# Altium PCB Cool.PcbDoc
Units mil, origin at the board's own origin, x right, y up, seen from the top; angles counter-clockwise.
Board outline 2569.58 x 5324.99 mil, 2 copper layers (Top Layer, Bottom Layer); 68 components, 80 nets, 334 pads, 177 vias.
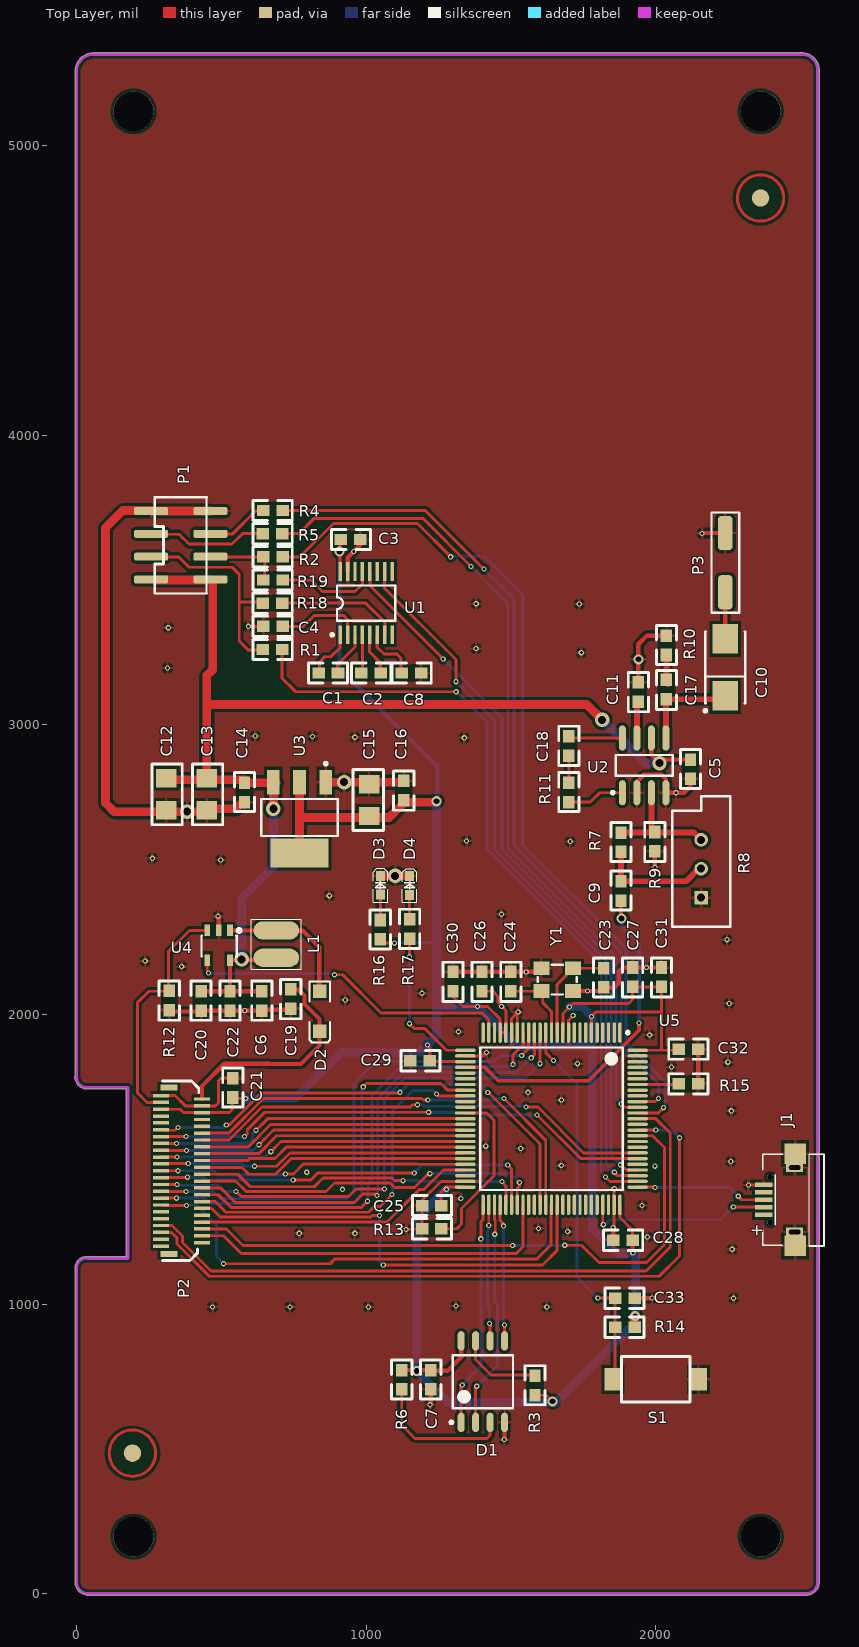
[diagram p0: Top Layer view]
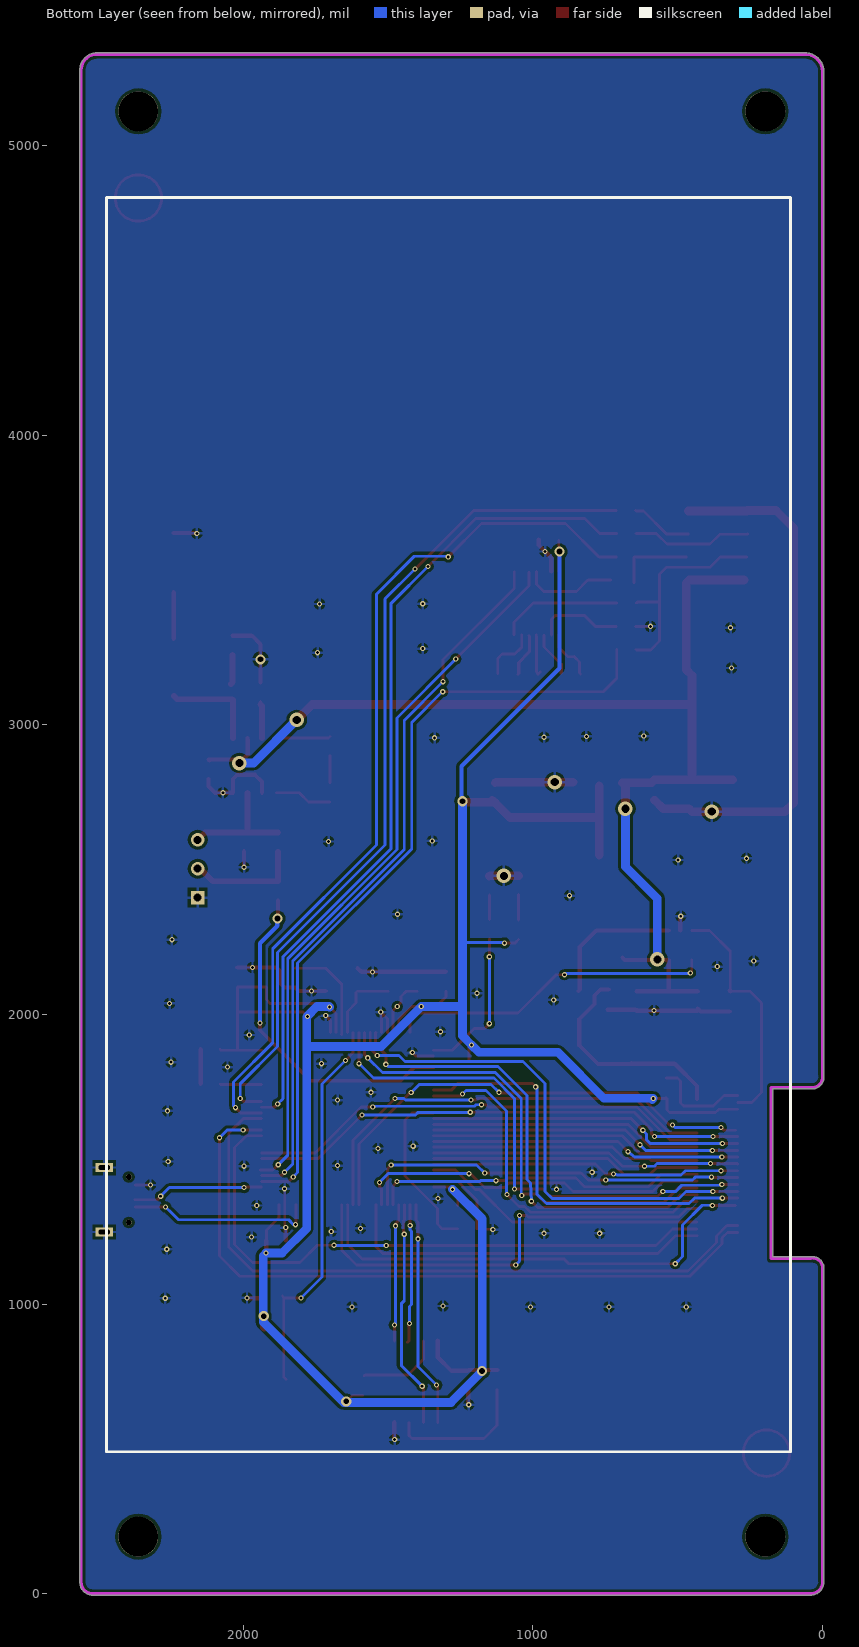
[diagram p1: Bottom Layer view, seen from below]

## Layer stack, top to bottom
Top Layer: signal copper 1.4
Dielectric: dielectric 12.6, FR-4, Dk 4.8
Bottom Layer: signal copper 1.4

## Board outline
-5.01,40 -5.01,1130 cw(c0,1130) -4.93,1130.94 cw(c33.74,1123.74) 40.45,1162.5 172.15,1162.5 172.15,1743.02 30,1743.02 cw(c30,1748.03) 29.18,1743.08 cw(c35.98,1784.02) -5.01,1790.4 -5.01,5249.8 cw(c59.96,5255) -5,5260.41 cw(c0,5260) -5,5260.43 cw(c59.96,5255) 54.53,5319.96 cw(c54.96,5314.96) 54.96,5319.98 2505.04,5319.98 cw(c2505.04,5260.94) 2564.07,5260.94 2564.07,39.06 cw(c2520,39.06) 2520,-5.02 40,-5.02 cw(c40,40)

## Design rules (kind name [scope] priority, off if disabled: settings)
Clearance [All] p1: gap=7
ComponentClearance [All] p1: gap=10 collisioncheckmode=3 verticalgap=10
PolygonConnect [All] p1: connectstyle=Relief reliefconductorwidth=10 reliefentries=4 polygonreliefangle="90 Angle"
RoutingVias [All] p1: holewidth=10 width=18 viastyle="Through Hole" minholewidth=8 minwidth=15 maxholewidth=28 maxwidth=50
SolderMaskExpansion [All] p1: expansion=4
TestPointUsage [All] p1: valid=0 allowmultiple=FALSE
Testpoint [All] p1: side=15 testpointundercomponent=TRUE minsize=40 maxsize=100 preferedsize=60 minholesize=0 maxholesize=40 preferedholesize=32 testpointgrid=1 style=1023 order=0123456789
Width [All] p1: maxlimit=30 minlimit=8 preferedwidth=10
18 further rules are at their usual default settings.

## Classes and differential pairs
component class Cool: C1 C2 C3 C4 C5 C6 C7 C8 C9 C10 C11 C12 C13 C14 C15 C16 C17 C18 C19 C20 C21 C22 D1 D2 L1 P1 P2 P3 R1 R2 R3 R4 R5 R6 R7 R8 R9 R10 R11 R12 R18 R19 U1 U2 U3 U4
component class mcu: C23 C24 C25 C26 C27 C28 C29 C30 C31 C32 C33 D3 D4 J1 R13 R14 R15 R16 R17 S1 U5 Y1

## Components (designator, comment, footprint, x,y, rotation, side; value= is the part's Value field where it differs from the comment)
C1 "100n" 0603 836,3179 r0 top
C2 "100n" 0603 1050,3179 r180 top
C3 "100n" 0603 980,3640 r180 top
C4 "100n" 0603 645,3340 r0 top
C5 "100n" 0603 2120,2880 r270 top
C6 "100n" 0603 640,2080 r270 top
C7 "100n" 0603 1223,772 r270 top
C8 "100n" 0603 1190,3179 r180 top
C9 "4.7uF" 0603 1880,2460 r270 top
C10 "220uF/6.3V" 6032 2240,3100 r90 top
C11 "100n" 0603 1940,3080 r90 top
C12 "47uF" 1206 310,2760 r270 top
C13 "22uF" 1206 450,2760 r270 top
C14 "100n" 0603 580,2800 r270 top
C15 "22uF" 1206 1010,2740 r90 top
C16 "100n" 0603 1130,2740 r90 top
C17 "4.7uF" 0603 2037,3088 r90 top
C18 "10uF" 0603 1700,2960 r270 top
C19 "100n" 0603 740,2020 r90 top
C20 "4.7uF" 0603 430,2080 r270 top
C21 "100n" 0603 540,1780 r270 top
C22 "100n" 0603 530,2080 r270 top
C23 "20pF" 0603 1820,2160 r270 top
C24 "20pF" 0603 1500,2080 r90 top
C25 "100n" 0603 1260,1340 r180 top
C26 "100n" 0603 1400,2080 r90 top
C27 "100n" 0603 1920,2095 r90 top
C28 "100n" 0603 1920,1220 r180 top
C29 "100n" 0603 1220,1840 r180 top
C30 "100n" 0603 1300,2080 r90 top
C31 "100n" 0603 2020,2095 r90 top
C32 "100n" 0603 2080,1880 r0 top
C33 "100n" 0603 1860,1020 r0 top
D1 "W25Q64" SOIC127P790X200-8N 1403,732 r90 top
D2 "SS14" SOD123 840,2080 r270 top
D3 "LED" 0603-LED 1049,2446 r90 top
D4 "LED" 0603-LED 1150,2445 r90 top
J1 "MICRO-USB" MICRO-USB 2460,1360 r90 top
L1 "4.7uH" SMD4532 690,2290 r270 top
P1 "INTERFACE" P_HEAD_2X4 360,3620 r270 top
P2 "TFT45_YC450001FW" FPC45 362.2,1460 r90 top locked
P3 "Header 2" P_Head_2 2240,3560 r0 top
R1 "0R" 0603 710,3260 r180 top
R2 "0R" 0603 645,3580 r0 top
R3 "10K" 0603 1583,752 r270 top
R4 "0R" 0603 645,3740 r0 top
R5 "0R" 0603 710,3660 r180 top
R6 "10K" 0603 1123,772 r270 top
R7 "4.99R" 0603 1880,2628 r270 top
R8 "RPot" VR5 2157,2503 r90 top
R9 "4.99R" 0603 1997,2563 r90 top
R10 "10R" 0603 2037,3308 r270 top
R11 "1.2K" 0603 1700,2800 r270 top
R12 "4.99R" 0603 320,2015 r90 top
R13 "10K" 0603 1260,1260 r180 top
R14 "10K" 0603 1860,920 r0 top
R15 "10K" 0603 2080,1760 r0 top
R16 "10K" 0603 1049,2326 r270 top
R17 "10K" 0603 1150,2328 r270 top
R18 "0R" 0603 710,3420 r180 top
R19 "0R" 0603 645,3500 r0 top
S1 "SW-PB" KEY6*4 2000,740 r0 top
U1 "MAX3232EUE" TSSOP16 1000,3420 r0 top
U2 "LM386M-1" M08A_N 1960,2860 r90 top
U3 "LM1117MPX-3.3" SOT223 770,2680 r180 top
U4 "MP3302" sot23-5 530,2290 r180 top
U5 "STM32F103V8T6" STM-LQFP100_N 1640,1640 r270 top
Y1 "12M" XTAL-SMD3225 1660,2120 r180 top

## Footprints (in the part's own frame and the unit in brackets; to place one, negate y for a bottom-side part, rotate by r counter-clockwise, add the part's x,y. Pads: shape width x height; smd on the part's side, far side on the other; paste and mask are expansions set on the pad)
0603 [mm]
  rect 1.1x1 smd: 1(0,0) 2(1.7,0)
  silkscreen extent -0.89,-0.89 2.54,0.89
0603-LED [mil]
  rect 35x31.5 smd: 1(-32.5,0) 2(32.5,0)
  silkscreen extent -58,-25 58,25
1206 [mm] "Chip Capacitor; Body 3.2 x 1.6 mm (LxW typ)"
  rect 1.6x1.8 smd: 1(-1.4,0) 2(1.4,0)
  silkscreen extent -2.67,-1.27 2.67,1.4
6032 [mm]
  rect 2.6x2.2 smd: 1(0,0) 2(5,0)
  silkscreen extent -1.42,-1.75 5.65,1.87
FPC45 [mm]
  rect 0.5x1.5 smd: 0(-7.3,1.1) 0(7.3,1.1)
  rect 0.3x1.4 smd: 1(-6.604,1.778) 2(-6.3,-1.8) 3(-6,1.778) 4(-5.7,-1.8) 5(-5.4,1.778) 6(-5.1,-1.8) 7(-4.8,1.778) 8(-4.5,-1.8) 9(-4.2,1.778) 10(-3.9,-1.8) 11(-3.6,1.778) 12(-3.3,-1.8) 13(-3,1.778) 14(-2.7,-1.8) 15(-2.4,1.778) 16(-2.1,-1.8) 17(-1.8,1.778) 18(-1.5,-1.8) 19(-1.2,1.778) 20(-0.9,-1.8) 21(-0.6,1.778) 22(-0.3,-1.8) 23(0,1.778) 24(0.3,-1.8) 25(0.6,1.778) 26(0.9,-1.8) 27(1.2,1.778) 28(1.5,-1.8) 29(1.8,1.778) 30(2.1,-1.8) 31(2.4,1.778) 32(2.7,-1.8) 33(3,1.778) 34(3.3,-1.8) 35(3.6,1.778) 36(3.9,-1.8) 37(4.2,1.778) 38(4.5,-1.8) 39(4.8,1.778) 40(5.1,-1.8) 41(5.4,1.778) 42(5.7,-1.8) 43(6,1.778) 44(6.3,-1.8) 45(6.6,1.778)
  silkscreen extent -7.87,-1.52 7.87,1.65
KEY6*4 [mm]
  rect 1.5x2 smd: 1(-3.75,0) 2(3.75,0)
  silkscreen extent -3,-2 3,2
M08A_N [mm] "SOIC, 8-Leads, Body 4.9x3.9mm, Pitch 1.27mm, IPC Medium Density"
  oval 2.2x0.6 smd: 1(-2.4,1.905) 2(-2.4,0.635) 3(-2.4,-0.635) 4(-2.4,-1.905) 5(2.4,-1.905) 6(2.4,-0.635) 7(2.4,0.635) 8(2.4,1.905)
  silkscreen extent -2.52,-2.5 0.9,2.88, body extent -1.95,-2.45 1.95,2.45, height 1.76
MICRO-USB [mm]
  rect 0.4x1.55 smd: 1(-1.3,2.2) 2(-0.65,2.2) 3(0,2.2) 4(0.65,2.2) 5(1.3,2.2)
  rect 0.8x1.5 hole 0.4 slot 1 at 90 deg: 6(2.825,-0.5) 7(-2.825,-0.5)
  rect 1.8x1.9 smd: 6(4.05,-0.55) 7(-4.05,-0.55)
  round 0.5 hole 0.5 unplated: ""(-2,1.65) ""(2,1.65)
  silkscreen extent -4.05,-3.07 4,2.3
P_Head_2 [mm]
  rrect50% 1.3x3 smd: 1(0,-2.6) 2(0,2.6)
  silkscreen extent -1.2,-4.4 1.22,4.4
P_HEAD_2X4 [mm]
  rrect50% 0.7x3 smd: 1(-3,-2.6) 2(-3,2.6) 3(-1,-2.6) 4(-1,2.6) 5(1,-2.6) 6(1,2.6) 7(3,-2.6) 8(3,2.6)
  silkscreen extent -4.2,-2.29 4.24,2.29
SMD4532 [mm]
  oval 1.6x4 smd: 1(0,0) 2(2.4,0)
  silkscreen extent -1,-2.2 3.4,2.2, body extent -1.04,-2.06 3.44,1.94, height 3.18
SOD123 [mm]
  rect 1.2x1.2 smd: 1(0,0) 2(3.5,0)
  silkscreen extent -0.85,-0.9 4.5,0.9, body extent -0.05,-0.8 3.65,0.8, height 1.27
SOIC127P790X200-8N [mm] "SOIC, 8-Leads, Body 5.3x5.3mm (max), Pitch 1.27mm, IPC Medium Density"
  oval 1.7x0.6 smd: 1(-3.575,1.905) 2(-3.575,0.635) 3(-3.575,-0.635) 4(-3.575,-1.905) 5(3.575,-1.905) 6(3.575,-0.635) 7(3.575,0.635) 8(3.575,1.905)
  silkscreen extent -3.7,-2.65 2.33,2.88, body extent -2.64,-2.64 2.64,2.64, height 2
sot23-5 [mm]
  rect 0.5x1 smd: 1(0,0) 2(1,0) 3(2,0) 4(2,2.6) 5(0,2.6)
  silkscreen extent -0.95,-0.15 2.5,2.27, body extent -0.46,-0.13 2.44,2.67, height 1.09
SOT223 [mm]
  rect 1.1x2.15 smd: 1(-2.3,-3.1) 2(0,-3.1) 3(2.3,-3.1)
  rect 5.08x2.54 smd: 4(0,3.1)
  silkscreen extent -3.35,-4.85 3.35,1.62
STM-LQFP100_N [mm] "Thin QFP, 100-Leads, Body 14x14mm, Pitch 0.5mm, IPC Medium Density"
  oval 1.8x0.3 smd: 1(-7.55,6) 2(-7.55,5.5) 3(-7.55,5) 4(-7.55,4.5) 5(-7.55,4) 6(-7.55,3.5) 7(-7.55,3) 8(-7.55,2.5) 9(-7.55,2) 10(-7.55,1.5) 11(-7.55,1) 12(-7.55,0.5) 13(-7.55,0) 14(-7.55,-0.5) 15(-7.55,-1) 16(-7.55,-1.5) 17(-7.55,-2) 18(-7.55,-2.5) 19(-7.55,-3) 20(-7.55,-3.5) 21(-7.55,-4) 22(-7.55,-4.5) 23(-7.55,-5) 24(-7.55,-5.5) 25(-7.55,-6) 51(7.55,-6) 52(7.55,-5.5) 53(7.55,-5) 54(7.55,-4.5) 55(7.55,-4) 56(7.55,-3.5) 57(7.55,-3) 58(7.55,-2.5) 59(7.55,-2) 60(7.55,-1.5) 61(7.55,-1) 62(7.55,-0.5) 63(7.55,0) 64(7.55,0.5) 65(7.55,1) 66(7.55,1.5) 67(7.55,2) 68(7.55,2.5) 69(7.55,3) 70(7.55,3.5) 71(7.55,4) 72(7.55,4.5) 73(7.55,5) 74(7.55,5.5) 75(7.55,6)
  oval 0.3x1.8 smd: 26(-6,-7.55) 27(-5.5,-7.55) 28(-5,-7.55) 29(-4.5,-7.55) 30(-4,-7.55) 31(-3.5,-7.55) 32(-3,-7.55) 33(-2.5,-7.55) 34(-2,-7.55) 35(-1.5,-7.55) 36(-1,-7.55) 37(-0.5,-7.55) 38(0,-7.55) 39(0.5,-7.55) 40(1,-7.55) 41(1.5,-7.55) 42(2,-7.55) 43(2.5,-7.55) 44(3,-7.55) 45(3.5,-7.55) 46(4,-7.55) 47(4.5,-7.55) 48(5,-7.55) 49(5.5,-7.55) 50(6,-7.55) 76(6,7.55) 77(5.5,7.55) 78(5,7.55) 79(4.5,7.55) 80(4,7.55) 81(3.5,7.55) 82(3,7.55) 83(2.5,7.55) 84(2,7.55) 85(1.5,7.55) 86(1,7.55) 87(0.5,7.55) 88(0,7.55) 89(-0.5,7.55) 90(-1,7.55) 91(-1.5,7.55) 92(-2,7.55) 93(-2.5,7.55) 94(-3,7.55) 95(-3.5,7.55) 96(-4,7.55) 97(-4.5,7.55) 98(-5,7.55) 99(-5.5,7.55) 100(-6,7.55)
  silkscreen extent -7.67,-6.25 6.25,6.83, body extent -7,-7 7,7, height 1.6
TSSOP16 [mm] "Shrink Small Outline; 16 Leads; Body Width 4.4 mm; Pitch 0.65 mm"
  rect 0.3x1.65 smd: 1(-2.275,-2.775) 2(-1.625,-2.775) 3(-0.975,-2.775) 4(-0.325,-2.775) 5(0.325,-2.775) 6(0.975,-2.775) 7(1.625,-2.775) 8(2.275,-2.775) 9(2.275,2.775) 10(1.625,2.775) 11(0.975,2.775) 12(0.325,2.775) 13(-0.325,2.775) 14(-0.975,2.775) 15(-1.625,2.775) 16(-2.275,2.775)
  silkscreen extent -3.1,-2.9 2.55,1.55
VR5 [mm] "Potentiometer; 3 Leads"
  rect 1.2x1.2 hole 0.7: 1(-2.54,0)
  round 1.2 hole 0.7: 2(0,0) 3(2.54,0)
  silkscreen extent -5.08,-2.54 6.35,2.54
XTAL-SMD3225 [mm]
  rect 1.4x1.2 smd: 1(-1.4,-1) 2(1.4,-1) 3(1.4,1) 4(-1.4,1)
  silkscreen extent -1.7,-1.3 1.7,1.3

## Part data
C1 C2 C3 C4 C5 C6 C7 C8 C9 C10 C11 C13 C14 C15 C16 C17 C18 C19 C20 C21 C22 C23 C24 C25 C26 C27 C28 C29 C30 C31 C32 C33: library part CAP, "贴片瓷片电容"
C12: library part ELECTRO, "贴片电解电容"
D2: library part "D Schottky", "Schottky Diode"
D3 D4: "贴片发光二极管"
J1: "Micro USB插座"
L1: library part Inductor
P1: library part "Header 4X2", "Header, 4-Pin, Dual row"
P3: "Header, 2-Pin"
R1 R2 R3 R4 R5 R6 R7 R9 R10 R11 R12 R13 R14 R15 R16 R17 R18 R19: library part RES, "贴片电阻（5%）"
R8: "Potentiometer"
S1: "按钮开关"
U1: "3.0V TO 5.5V, Low-Power, up to 1Mbps, True RS-232 Transceiver Using Four 0.1礔 External Capacitor"
U2: "Low-Voltage Audio Power Amplifier"
U3: library part LM1117, "电源LDO"
U5: "ARM Cortex-M3 32-bit MCU, 64 KB Flash, 20 KB Internal RAM, 80 I/Os, 100-pin LQFP, -40 to 85 degC, Tray"
Y1: library part XTAL4, "晶振"

## Free pads (board coordinates)
  round 137.8 hole 137.8 unplated: 0(196.85,196.85) 0(196.85,5118.11) 0(2362.2,196.85) 0(2362.2,5118.11)
  round 60 smd mask+40: 1(193,485) 1(2362,4819)

## Via types
v1: diameter 18, hole 10, Top Layer to Bottom Layer, 163 vias
v2: diameter 35, hole 20, Top Layer to Bottom Layer, 7 vias
v3: diameter 50, hole 28, Top Layer to Bottom Layer, 7 vias

## Nets (pads, with @x,y where several pads share a name; then routed paths per layer and width w, separated by ;. In a path a pad name is that pad's centre, name@x,y a point inside that pad or via, vN(x,y) a via of type N, cw(c..) or ccw(c..) an arc to the next point about the centre after c; other vN are vias at no path point)
3.3V: C3.2 C7.1 C15.1 C16.1 C21.2 C25.1 C26.1 C27.1 C28.1 C29.1 C30.1 C31.1 C32.1 D1.8 P2.40 P2.41 R3.2 R6.1 R14.2 R16.2 U1.16 U3.2 U3.4 U5.6 U5.11 U5.21 U5.22 U5.28 U5.50 U5.75 U5.100 | length 9895.1
  Top Layer w8: R3.2@1586,685 1623,685 v2(1644,664)
  Top Layer w10: P2.41 357.4,1672.6 369.21,1660.79 527.72,1660.79 536.93,1670 536.93,1710 C21.2 ; C21.2@540,1710 v1@590,1710 ; U1.16 v2@910.43,3588 ; v2@910.43,3598 C3.2@910.43,3636 ; R16.2 1062.07,2246 v1(1098,2246) ; v1(1212,1894) 1220,1886 C29.1 1223.15,1836.85 U5.28 ; C25.1 1259,1341 1259,1387 1275.78,1403.78 U5.50 ; C30.1 1300,2061 1334,2027 1419,2027 1462.83,1983.17 U5.22 U5.21 1482.52,2013.48 1454.92,2041.08 1454.92,2062.08 1437,2080 C26.1 ; U5.11 1679.37,2003.37 1714,2038 1907,2038 1920,2051 C27.1 2018,2095 2019,2094 C31.1 2020,1878.22 2018,1876.22 ; U5.6 v1(1777.8,1992.8) 1793,2008 2018,2008 2020,2010 ; U5.75 1876.22,1298.78 1920,1255 C28.1 ; U5.100 2076.22,1876.22 C32.1
  Top Layer w15: R6.1 C7.1 1226,769 1281,769 1328,816 D1.8 ; v1@1920,1176 C28.1
  Top Layer w30: U3.4@770,2550 U3.2@770,2790 ; 770,2680 1080,2680 C16.1@1140,2740 ; C16.1@1130,2733 1240,2733 v2(1243,2736) ; R14.2 v2@1926.93,955.93
  Bottom Layer w10: v1(1098,2246) 1100,2248 1243,2248
  Bottom Layer w15: v2(908,3598) 908,3195 1246,2857 1246,2740 v2@1243,2737
  Bottom Layer w30: v1@588,1706 v1(584,1710) 754,1710 913,1869 1186,1869 v1@1210.8,1893.8 ; v1@1211.5,1894.5 1243,1926 v2(1243,2736) ; 1243,2022 1248,2027 v1(1385,2027) 1523,1889 1778,1889 1781,1886 ; v1(1277,1396) 1175,1294 v2(1175,769) 1282,662 1282,660 1653,660 1931,938 1931,1166 v1(1921,1176) 1866,1176 1781,1261 1781,1992 1746,2027 1703,2027 v1(1701.65,2025.65)
  other v1: 1468,2027
  other v2: 1929,958
CS: P2.7 U5.88 | length 2397.1
  Top Layer w10: P2.7 329,1271.02 330,1271 366,1235 366,1212.04 464.04,1114 1967,1114 2050,1197 2050,1590 2000,1640 U5.88
D00: P2.35 U5.61 | length 1657.6
  Top Layer w10: P2.35@300,1600 340,1600 v1(350,1610) ; v1(517.26,1618.45) 527.45,1618.45 638,1729 1115,1729 v1(1117,1731) ; v1@1423,1730 1600,1553 U5.61@1600,1342.76
  Bottom Layer w10: v1(350,1610) 508.81,1610 v1(517.26,1618.45) ; v1(1117,1731) 1144,1758 1392,1758 v1(1420,1730)
D01: P2.34 U5.62 | length 1524.7
  Top Layer w10: P2.34 525.92,1589.92 646,1710 1193,1710 1199,1704 v1(1213,1704) ; v1(1476,1710) 1620.32,1565.68 U5.62
  Bottom Layer w10: v1(1213,1704) 1439,1704 1445,1710 v1(1476,1710)
D02: P2.33 U5.81 | length 1754.2
  Top Layer w10: P2.33 v1(378.11,1578.11) ; v1(580,1578.11) 589.53,1587.64 589.53,1601.64 649.88,1662 v1(1216,1662) ; v1(1590,1653) 1740.8,1502.2 U5.81
  Bottom Layer w10: v1(378.11,1578.11) v1(580,1578.11) ; v1(1216,1662) 1217.27,1660.73 1397.3,1660.73 1405.04,1653 v1(1590,1653)
D03: P2.32 U5.82 | length 1623.4
  Top Layer w10: P2.32 526.34,1566.3 640.04,1680 1153,1680 1161,1688 v1(1177,1688) ; v1(1552.52,1679.99) 1593.01,1679.99 1751.11,1521.89 U5.82
  Bottom Layer w10: v1(1177,1688) 1196,1688 1201,1683 1549.51,1683 v1(1552.52,1679.99)
D04: P2.31 U5.38 | length 1097.7
  Top Layer w10: P2.31 v1(345.51,1554.49) ; v1(620,1600) 660,1640 U5.38
  Bottom Layer w10: v1(345.51,1554.49) 594.49,1554.49 607,1567 607,1587 v1(620,1600)
D05: P2.30 U5.39 | length 941.8
  Top Layer w10: P2.30 592.68,1542.68 670.32,1620.32 U5.39
D06: P2.29 U5.40 | length 1080.2
  Top Layer w10: P2.29 293.07,1530 v1(380,1530) ; v1(630,1550) 680.63,1600.63 U5.40
  Bottom Layer w10: v1(380,1530) 610,1530 v1(630,1550)
D07: P2.28 U5.41 | length 935.3
  Top Layer w10: P2.28 629.06,1519.06 690.94,1580.94 U5.41
D08: P2.27 U5.42 | length 1075.6
  Top Layer w10: P2.27 v1(347.24,1507.24) v1@350,1510 ; v1(671,1526) 706.26,1561.26 U5.42
  Bottom Layer w10: v1(347.24,1507.24) 647.24,1507.24 v1(671,1526)
D09: P2.26 U5.43 | length 928.8
  Top Layer w10: P2.26 591.38,1495.43 598,1502.06 685,1502.06 724.52,1541.57 U5.43
D10: P2.25 U5.44 | length 1073.9
  Top Layer w10: P2.25 293.39,1484.81 v1(385.95,1484.81) ; v1(614.62,1475.79) 690.75,1475.79 736.85,1521.89 U5.44
  Bottom Layer w10: v1(385.95,1484.81) 570.69,1484.81 579.71,1475.79 v1(614.62,1475.79)
D11: P2.24 U5.45 | length 942
  Top Layer w10: P2.24 571.19,1471.81 595,1448 687,1448 741.2,1502.2 U5.45
D12: P2.23 U5.46 | length 1072.7
  Top Layer w10: P2.23 v1(350,1460) ; v1(721,1449) 749,1449 783,1483 1178.52,1483 1179,1482.52 U5.46
  Bottom Layer w10: v1(350,1460) 473,1460 488,1445 708.46,1445 710.91,1447.45 719.45,1447.45 v1(721,1449)
D13: P2.22 U5.55 | length 1156.5
  Top Layer w10: P2.22 556.81,1448.19 600,1405 821,1405 851,1435 1089.04,1435 1098.04,1426 v1(1127,1426) ; v1(1469,1423) 1482.52,1407.48 U5.55
  Bottom Layer w10: v1(1127,1426) 1180,1426 1183,1423 v1(1469,1423)
D14: P2.21 U5.56 | length 1365.9
  Top Layer w10: P2.21 381.38,1436.38 v1(383,1438) ; v1(748,1428) 809,1428 833,1452 v1(1166,1452) ; v1(1489,1480) 1502.2,1466.8 U5.56
  Bottom Layer w10: v1(383,1438) 439,1438 449,1428 v1(748,1428) ; v1(1166,1452) 1194,1480 v1(1489,1480)
D15: P2.20 U5.57 | length 1242.9
  Top Layer w10: P2.20 549.43,1424.57 586,1388 861,1388 891,1418 1082,1418 1098,1402 1166.96,1402 1214.96,1450 v1(1220,1450) ; U5.57 1521.89,1398 1529,1405.11 v1(1529,1420)
  Bottom Layer w10: v1(1220,1450) 1500,1450 1520,1430 v1(1529,1420)
DAC: C9.2 U5.29 | length 1164.2
  Top Layer w13: U5.29 1410,1817.17 1456.17,1771 1768,1771 1942,1945 v1(1942,1970)
  Top Layer w15: C9.2 1880,2333 v2(1882,2331)
  Bottom Layer w15: v2(1882,2331) 1882,2306 1942,2246 v1(1942,1970)
F\L\A\S\H\_\C\S\: D1.1 U5.51 | length 785.2
  Top Layer w10: D1.1 1328,720 v1(1332,720) ; v1(1396,1225) 1396,1283 1403.78,1290.78 U5.51
  Bottom Layer w10: v1(1332,720) 1396,784 v1(1396,1225)
FLASH_CLK: D1.6 U5.52 | length 483.4
  Top Layer w10: v1(1423.46,1271.54) U5.52 ; v1(1426,933) 1429,930 1429,922 ; 1428,923 D1.6 1432,868.75 D1.6@1432,868
  Bottom Layer w10: v1(1423.46,1271.54) 1423.46,1255.46 1419,1251 1419,998 1426,991 v1(1426,933)
FLASH_MISO: D1.2 U5.53 | length 789.3
  Top Layer w10: D1.2 1378,713 v1(1382,716) ; U5.53 1443.15,1290.85 1445.83,1288.17 1445.83,1242.83 v1(1444,1241)
  Bottom Layer w10: v1(1382,716) 1454,788 1454,1001 1444,1011 v1(1444,1241)
FLASH_MOSI: D1.5 U5.54 | length 476.3
  Top Layer w10: U5.54 1462.83,1288.17 1472,1279 1472,1272 v1(1474,1270) ; D1.5 v1(1478,928)
  Bottom Layer w10: v1(1474,1270) 1474,932 v1(1478,928)
GND: C3.1 C4.1 C5.2 C6.2 C7.2 C8.1 C11.2 C12.2 C13.2 C14.2 C15.2 C16.2 C19.1 C20.2 C21.1 C22.2 C23.2 C24.2 C25.2 C26.2 C27.2 C28.2 C29.2 C30.2 C31.2 C32.2 C33.2 D1.4 D3.2 D4.2 J1.5 J1.6 J1.7 P1.1 P1.2 P2.42 P2.45 P3.2 R8.1 R9.1 R10.1 R12.1 R13.2 R15.2 S1.2 U1.15 U2.2 U2.4 U3.1 U4.2 U5.10 U5.19 U5.20 U5.27 U5.49 U5.74 U5.99 Y1.2 Y1.4 | length 5734.8
  Top Layer w10: P2.45 340.16,1719.84 375.59,1684.41 480,1684.41 490,1694.41 490,1730 489.69,1730.31 489.69,1769.69 500,1780 C21.1 ; v1(594,3340) C4.1 ; v1(1138,1257) R13.2 1193.07,1358.07 1258.46,1423.46 U5.49 ; U5.27 1404.54,1856.54 v1(1416,1868) ; U5.20 1502.2,1985.2 v1(1525,2008) ; U5.19 v1@1521.89,2004.89 ; U5.10 1699.06,1980.06 v1(1715,1996) ; v1(1853.07,1264) 1856.54,1267.46 1856.54,1397.54 v1(1857,1398) ; v1(2320,1411) 2320.18,1411.18 J1.5
  Top Layer w15: R12.1@320,2010 420,2010 C20.2@430,2020 ; C20.2 638.07,2013.07 C6.2@640,2015 ; v1(489,2339) 490.63,2337.37 U4.2 ; v1@581,2013 v1(581,2013.07) ; C6.2@643,2012 647,2016 C19.1@742,2016 ; U1.15 936.02,3577.02 980,3621 C3.1 ; v1(1221,652) 1223,654 C7.2 ; C30.2 1592.44,2146.93 Y1.2 ; v1(1477,532) 1478,533 D1.4 ; Y1.4 1807.56,2080.63 C23.2 1857.07,2093.07 1872,2108 1872,2148 1885.93,2161.93 C31.2 ; C28.2 v1(1853.07,1264) ; C33.2 1986,1020 v1(1987,1021) ; U2.2 1935,2803 1959,2827 2021,2827 2035,2813 U2.4 2097.51,2765.51 2120,2788 C5.2 ; C11.2 1940,3278 1970,3308 R10.1 ; v1(1997,2508) R9.1 ; R15.2 C32.2 ; v1(2160,3661) 2161.36,3662.36 P3.2
  Top Layer w30: P1.1@257.64,3740 160,3740 100,3680 100,2730 130,2700 450,2700 460,2710 550,2710 C14.2@580,2740 ; P1.1@260,3740 261.89,3738.11 P1.2 ; U3.1 1127.95,2802.05 C16.2@1130,2800 ; D3.2 1149,2478.5 D4.2
  other v1: 470,990 737,990 1008,990 1624,990 1310,993 2269,1020 2264,1189 1971,1231 769,1244 961,1244 1696,1250 1595,1261 1953,1340 1327,1364 918,1396 795,1455 1997,1476 1674,1478 2259,1492 1534,1537 1413,1545 2261,1667 1674,1704 1559,1731 2054,1818 1730,1830 2249,1835 1979,1929 1319,1940 2254,2038 928,2050 1193,2073 1764,2080.63 1553,2146.93 1968,2161.93 363,2165 237,2184 2246,2258 1467,2346 873,2410 498,2533 262,2539 1705,2597 1347,2599 2070,2765.51 1339,2955 961,2957 815,2960 617,2961 314,3196 1743,3249 1380,3263 317,3335 1736,3417 1380,3418 957.41,3598.41
  other v2: 1940,3226
  other v3: 1100,2478.5 382,2700 924,2802.05
LCD_RST: P2.8 U5.47 | length 984.2
  Top Layer w10: P2.8 1071.83,1282.83 1185,1396 1200,1396 1266.83,1462.83 U5.47
LED: R17.2 U5.26 | length 523.8
  Top Layer w10: v1(1150,1968) 1167.27,1950.73 1203.49,1950.73 1278,1876.22 U5.26 ; v1(1150,2199) R17.2
  Bottom Layer w10: v1(1150,1968) v1(1150,2199)
LED_PWM: U4.4 U5.24 | length 1125.8
  Top Layer w10: U4.4 451.26,2147.74 v1(456,2143) ; v1(891,2137) 919.18,2137 1051.18,2005 1401,2005 1423.46,1982.54 U5.24
  Bottom Layer w10: v1(456,2143) 458,2141 887,2141 v1(891,2137)
LEDA: C19.2 D2.2 P2.44 | length 762.6
  Top Layer w15: P2.44 433.07,1753.07 510,1830 660,1830 ; 660,1831 660,1829 775,1829 839,1893 839,1984 787,2036 787,2065 766,2086 C19.2@738,2086
LEDK: P2.43 R12.2 U4.3 | length 837.3
  Top Layer w10: P2.43 243.78,1696.22 210,1730 210,2040 250,2080 R12.2@318.07,2080 ; R12.2 318.07,2083.86 318.07,2218.07 390,2290 U4.3
  Top Layer w15: R12.2@318.07,2083.86 318.07,2080 R12.2
NetC1_1: C1.1 U1.1 | length 179.7
  Top Layer w10: C1.1@835,3176 839,3180 839,3217 857,3235 ; 856,3236 857,3235 ; U1.1 910.43,3267.43 878,3235 857,3235
NetC1_2: C1.2 U1.3 | length 187
  Top Layer w10: C1.2@901,3179 901,3209 ; C1.2@903,3178 903,3210 961.61,3268.61 U1.3
NetC2_1: C2.1 U1.5 | length 206.4
  Top Layer w10: U1.5@1012,3306 1012,3252 1049,3215 C2.1@1049,3178 ; U1.5@1013,3306 U1.5@1013,3308 ; 1034,3228 1047,3215 1047,3178 C2.1@1051,3174
NetC2_2: C2.2 U1.4 | length 146.4
  Top Layer w10: C2.2@973,3183 C2.2@982,3174 ; C2.2@983,3178 987,3182 U1.4@987,3307 ; U1.4@988,3307 U1.4@988,3310
NetC4_2: C4.2 U1.2 | length 298.9
  Top Layer w10: C4.2 784,3340 822,3378 922,3378 936.02,3363.98 U1.2
NetC8_2: C8.2 U1.6 | length 193.2
  Top Layer w10: U1.6@1038,3310 1038,3268 1062,3244 1106,3244 1121,3229 C8.2@1121,3177
NetC9_1: C9.1 R7.2 R8.2 | length 398.7
  Top Layer w10: C9.1 C9.1@1882,2462
  Top Layer w20: R7.2 C9.1 2105,2460 2148,2503 R8.2
NetC10_1: C10.1 C17.1 U2.5 | length 342.3
  Top Layer w20: U2.5 2035,3086 C17.1 2228,3088 C10.1
NetC10_2: C10.2 P3.1 | length 160.8
  Top Layer w15: C10.2 P3.1
NetC11_1: C11.1 U2.7 | length 127.6
  Top Layer w10: C11.1@1940,3070 C11.1
  Top Layer w20: U2.7 1935,3065 C11.1@1940,3070
NetC17_2: C17.2 R10.2 | length 102.1
  Top Layer w20: R10.2 2037,3146 C17.2@2042,3141
NetC18_1: C18.1 U2.8 | length 187.3
  Top Layer w10: C18.1 1705.51,2954.49 U2.8
NetC18_2: C18.2 R11.1 | length 93.1
  Top Layer w10: R11.1 C18.2
NetD1_3: D1.3 R6.2 | length 495.9
  Top Layer w10: R6.2 1123,582 1169,536 1417,536 1428,547 D1.3
NetD1_7: D1.7 R3.1 | length 292.9
  Top Layer w10: D1.7 1378,808 1431,755 1580,755 R3.1
NetD2_1: D2.1 L1.1 U4.1 | length 485.3
  Top Layer w15: U4.1 781,2290 838,2233 838,2085 D2.1@842,2081
NetD3_1: D3.1 R16.1 | length 87.5
  Top Layer w10: R16.1 D3.1
NetD4_1: D4.1 R17.1 | length 84.5
  Top Layer w10: R17.1 D4.1
NetP1_3: P1.3 R5.2 | length 415
  Top Layer w10: P1.3 259.01,3658 354,3658 388,3624 537,3624 573,3660 R5.2
NetP1_4: P1.4 R4.1 | length 216
  Top Layer w10: P1.4 539.37,3659.37 618,3738 643,3738 R4.1
NetP1_5: P1.5 R1.2 R18.2 | length 736.6
  Top Layer w10: P1.5@260,3580 352,3580 388,3544 538,3544 562,3520 562,3289 593,3258 641.07,3258 R1.2 ; 562,3421 565,3424 639.07,3424 R18.2
NetP1_6: P1.6 R2.1 R19.1 | length 270
  Top Layer w10: P1.6@470,3580 650,3580 R19.1@650,3490
NetR7_1: R7.1 R8.3 R9.2 U2.3 | length 410.9
  Top Layer w20: R7.1 2132,2628 R8.3 ; R9.2@1985,2641.93 U2.3
NetR11_2: R11.2 U2.1 | length 198.4
  Top Layer w10: R11.2 1774.07,2733.07 1806.51,2765.51 U2.1
NetR13_1: R13.1 U5.37 | length 589.5
  Top Layer w10: R13.1 1313,1260 1329,1276 1329,1330 1441,1442 1441,1635 1416.32,1659.68 U5.37
NetR15_1: R15.1 U5.94 | length 143.5
  Top Layer w10: U5.94 2078.11,1758.11 R15.1
PC0: P2.19 U5.15 | length 1809.4
  Top Layer w10: P2.19 v1(347.24,1412.76) v1@350,1410 ; v1(551,1389) 569,1371 939,1371 965,1397 v1(1063,1397) ; v1(1600,1830) 1600.63,1830.63 U5.15
  Bottom Layer w10: v1(347.24,1412.76) 350,1410 485.39,1410 506.39,1389 v1(551,1389) ; v1(1063,1397) 1063,1708.96 1134.04,1780 1550,1780 v1(1600,1830)
PC1: P2.18 U5.16 | length 1654.6
  Top Layer w10: P2.18 458.33,1400.9 498,1400.9 548.07,1350.83 959.83,1350.83 988.45,1379.45 1033.55,1379.45 v1(1038,1375) ; v1(1570,1850) 1580.94,1860.94 U5.16
  Bottom Layer w10: v1(1038,1375) 1040,1377 1040,1710 1130,1800 1518.85,1800 ; 1519.42,1799.42 v1(1570,1850)
PC2: P2.17 U5.17 | length 1767.2
  Top Layer w10: P2.17@292,1389 377.54,1389 v1(378.27,1388.27) ; v1(1537,1858) 1561.26,1882.26 U5.17
  Bottom Layer w10: v1(378.27,1388.27) 470.73,1388.27 495,1364 933,1364 958,1389 958,1761 1034,1837 1441,1837 1462,1858 v1(1537,1858)
PC3: P2.16 U5.18 | length 1615.1
  Top Layer w10: P2.16 489.68,1377.32 533.17,1333.83 983.83,1333.83 v1(1005,1355) ; v1(1507.55,1827.55) 1507.55,1860.55 1542,1895 1543,1895 U5.18@1543,1937 ; U5.18@1541.57,1937 U5.18
  Bottom Layer w10: v1(1005,1355) 1008,1418 1020,1430 1020,1720 1120,1820 1500,1820
PC4: P2.15 U5.33 | length 1459.8
  Top Layer w10: P2.15 v1(345.51,1365.51) v1@350,1370 ; v1(990,1750) 1001,1761 1259,1761 1281.57,1738.43 U5.33
  Bottom Layer w10: v1(345.51,1365.51) 442,1365.51 460.51,1347 953,1347 985,1379 985,1745 v1(990,1750)
PC5: P2.14 U5.34 | length 1273.9
  Top Layer w10: P2.14 479,1353.7 515.87,1316.83 1007.96,1316.83 1028.12,1337 1048,1337 v1(1089,1378) ; v1(1243,1725) 1249.26,1718.74 U5.34
  Bottom Layer w10: v1(1089,1378) 1091,1380 1091,1666 1162,1737 1230.48,1737 v1(1243,1725)
PC6: P2.13 U5.63 | length 1651.6
  Top Layer w10: P2.13@300,1340 v1(380,1340) ; v1(508,1139) 876,1139 893,1156 1590,1156 1639,1205 U5.63@1639,1342 ; U5.63@1640,1342 U5.63
  Bottom Layer w10: v1@380,1341 415,1341 483,1273 483,1164 v1(508,1139)
PC7: P2.12 U5.64 | length 1583.1
  Top Layer w10: P2.12 466.92,1330.08 497.17,1299.83 1015,1299.83 1021.17,1306 v1(1046,1306) ; v1(1059,1135) 1609,1135 1659.68,1185.68 U5.64
  Bottom Layer w10: v1(1046,1306) 1046,1148 v1(1059,1135)
R\S\T\: C33.1 R14.1 S1.1 U5.14 | length 1340.3
  Top Layer w10: U5.14 1620.32,1867.68 v1(1647,1841) ; v1(1800,1021) 1858,1021 C33.1@1864,1027 ; S1.1 1860,747.64 R14.1 C33.1
  Bottom Layer w10: v1(1647,1841) 1728,1760 1728,1093 v1(1800,1021)
RD: P2.6 U5.85 | length 2116.5
  Top Layer w10: P2.6 517.79,1259.21 575,1202 v1(1506,1202) ; v1(1686,1203) 1744,1203 1804,1143 1965,1143 1966,1142 2030,1206 2030,1540 1989.06,1580.94 U5.85
  Bottom Layer w10: v1(1506,1202) 1685,1202 v1(1686,1203)
RS: P2.4 U5.58 | length 1288.1
  Top Layer w10: P2.4 507.41,1235.59 568,1175 1519,1175 1541.57,1197.57 U5.58
RX: U1.12 U5.79 | length 2475.2
  Top Layer w10: U1.12@1013,3528 1013,3480 v1(1266,3227) ; v1(1879,1481) 1897.17,1462.83 U5.79 ; U5.79@1937.24,1463 U5.79@1941,1463
  Bottom Layer w10: v1(1266,3227) 1469,3024 1469,2569 1846,2192 1846,1514 v1(1879,1481)
RXD: R19.2 U1.13 | length 328.6
  Top Layer w10: R19.2@730,3500 810,3500 847.5,3462.5 ; 847,3462 849,3460 962,3460 987.2,3485.2 U1.13
SPI3_MISO: R5.1 U5.90 | length 2874.8
  Top Layer w10: R5.1 768,3660 821,3713 1196,3713 v1(1362,3547) ; v1(1881,1691) 1892.63,1679.37 U5.90
  Bottom Layer w10: v1(1362,3547) 1489,3420 1489,2573.04 1863,2199.04 1863,1709 v1(1881,1691)
SPI3_MOSI: R4.2 U5.91 | length 2933.8
  Top Layer w10: R4.2 1204,3740 1406,3538 v1(1407,3538) ; U5.91 1999.06,1699.06 v1(2010,1710)
  Bottom Layer w10: v1(1407,3538) 1510,3435 1510,2585 1881,2214 1881,1889.69 2010,1760.69 v1(2010,1710)
SPI3_NSS: R1.1 U5.77 | length 2725.2
  Top Layer w10: R1.1 710,3161 757,3114 v1(1311,3114) ; v1(1827,1439) 1842.54,1423.46 U5.77
  Bottom Layer w10: v1@1311.5,3114.5 1418,3008 1418,2571 1812,2177 1812,1454 v1(1827,1439)
SPI3_SCK: R2.2 U5.89 | length 3056
  Top Layer w10: R2.2 772,3580 887,3695 1177,3695 v1(1292,3580) ; U5.89@1938,1659.68 U5.89 1937.93,1659 2008,1659 v1(2027,1678)
  Bottom Layer w10: v1@1292,3582 1409,3582 1540,3451 1540,2585 1898,2227 1898,1902 2033,1767 2033,1684 v1(2027,1678)
SWCLK: J1.3 U5.76 | length 454.3
  Top Layer w10: U5.76 1995.22,1403.78 v1(1997,1402) ; v1(2285,1372) 2297,1360 J1.3
  Bottom Layer w10: v1(1997,1402) 2255,1402 v1(2285,1372)
SWDIO: J1.2 U5.72 | length 648.3
  Top Layer w10: U5.72 1817.17,1275.83 v1(1819,1274) ; v1@2268.59,1334.41 J1.2
  Bottom Layer w10: v1(1819,1274) 1826,1274 1843,1291 2223,1291 2254,1322 ; 2254.5,1321.5 v1(2268,1335)
TX: U1.10 U5.78 | length 2486.6
  Top Layer w10: U1.10@1064,3528 1064,3471 1310,3225 v1(1310,3149) ; v1(1857,1455) 1868.85,1443.15 U5.78
  Bottom Layer w10: v1(1310,3149) 1444,3015 1444,2569.04 1829,2184.04 1829,1483 v1(1857,1455)
TXD: R18.1 U1.7 | length 426.3
  Top Layer w10: R18.1 999,3420 1065,3354 U1.7@1065,3310
VCC: C5.1 C6.1 C12.1 C13.1 C14.1 C20.1 C22.1 L1.2 P1.7 P1.8 U2.6 U3.3 U4.5 | length 4276.4
  Top Layer w15: C20.1 C6.1@642,2080 ; C22.1 U4.5 682.13,2187.64 L1.2 ; U2.6@1984,2949 1984,2897 v3(2013,2868) 2025,2880 C5.1 C5.1@2117,2877 ; U2.6@1985,2949 U2.6
  Top Layer w30: P1.7@270,3500 460,3500 470,3490 470,3190 450,3170 C13.1@450,2810 ; C12.1@310,2810 580,2810 590,2800 U3.3@690,2800 ; 450,3070 1762,3070 v3(1815,3017) ; v3(680,2710) U3.3@680,2800
  Bottom Layer w30: v3(570,2190) 570,2400 680,2510 v3(680,2710) ; v3(1815,3017) 1964,2868 v3(2013,2868)
WR: P2.5 U5.86 | length 2455.7
  Top Layer w10: P2.5 P2.5@295,1247.4 ; P2.5@295,1247 328,1247 346.51,1228.49 346.51,1207.49 458,1096 2012,1096 2082,1166 v1@2082,1572 ; U5.86 1999.63,1600.63 v1(2000,1601)
  Bottom Layer w10: v1(2000,1601) 2055,1601 v1(2082,1574)
XTAL1: C23.1 U5.12 Y1.1 | length 357.6
  Top Layer w10: U5.12@1660,1930 1659.68,1930.32 1659.68,2103.94 Y1.1 1819.37,2159.37 C23.1
XTAL2: C24.1 U5.13 Y1.3 | length 262.6
  Top Layer w10: C24.1 1605.51,2080 1610,2075.51 1610,2040 1640,2010 U5.13
pads on no net: J1. J1.1 J1.4 P2.0 P2.1 P2.2 P2.3 P2.9 P2.10 P2.11 P2.36 P2.37 P2.38 P2.39 U1.8 U1.9 U1.11 U1.14 U5.1 U5.2 U5.3 U5.4 U5.5 U5.7 U5.8 U5.9 U5.23 U5.25 U5.30 U5.31 U5.32 U5.35 U5.36 U5.48 U5.59 U5.60 U5.65 U5.66 U5.67 U5.68 U5.69 U5.70 U5.71 U5.73 U5.80 U5.83 U5.84 U5.87 U5.92 U5.93 U5.95 U5.96 U5.97 U5.98
copper on no net: | length 1005.3
  Top Layer w10: 273,485 ccw(c193,485) 273,485 ; 2442,4819 ccw(c2362,4819) 2442,4819

## Polygon pours and split planes (outlines as drawn)
GND on Top Layer "Top Layer-No Net" (solid, remove dead copper, pour order 1000): 2594,-42 2594,5309 2481,5422 73,5422 -85,5264 -85,28 -6,-51
GND on Bottom Layer "Top Layer-No Net" (solid, remove dead copper, pour order 1001): 2601,-42 38,-42 -102,98 -102,5207 82,5391 2477,5391 2612,5256

## Keep-outs
Keep-Out Layer:
  lines w10: 0,5250 cw(c59.96,5255) 54.96,5314.96 2505.04,5314.96 cw(c2505.04,5260.94) 2559.06,5260.94 2559.06,39.06 cw(c2520,39.06) 2520,0 40,0 cw(c40,40) 0,40 0,1130 cw(c33.74,1123.74) 40,1157.48 177.17,1157.48 177.17,1748.03 30,1748.03 cw(c35.98,1784.02) 0,1790 0,5260

## Silkscreen, mask and mechanical layers (free items; w line width, h text height)
Bottom Overlay:
  lines w10: 2471.5,4820.71 110,4820.71 110,490 2472.2,490 2472.2,4820.71
Mechanical 1:
  text "PCB板厚1.6mm" at 3285,2801 h150
  text "加上液晶后大概厚4mm" at 3277,2624 h150
  text "有两个接插件（P1,P3）高出板子1cm" at 3271,2439 h150
  text "液晶贴在PCB的背面" at 3274,2261 h150

## Dimensions
2362.2,5118.11 to 2240,3662.36 on Mechanical 1
257.64,3740 to 196.85,5118.11 on Mechanical 1
196.85,5118.11 to 2362.2,5118.11 on Mechanical 1
196.85,5118.11 to 196.85,196.85 on Mechanical 1
0,5260 to 2559.06,5260.94 on Mechanical 1
2520,0 to 2505.04,5314.96 on Mechanical 1

## Text inside footprints (layer, text, board x,y; h text height)
J1: Top Overlay "+" at 2367.48,1230.08 h40 r90